# Altium PCB Converter.PcbDoc
Units mil, origin at the board's own origin, x right, y up, seen from the top; angles counter-clockwise.
Board outline 880 x 1440 mil, 2 copper layers (Top1, Bottom2), stack 36.422 mil thick; 13 components, 18 nets, 131 pads, 25 vias.
Unrouted connection lines stored in the file: 98.
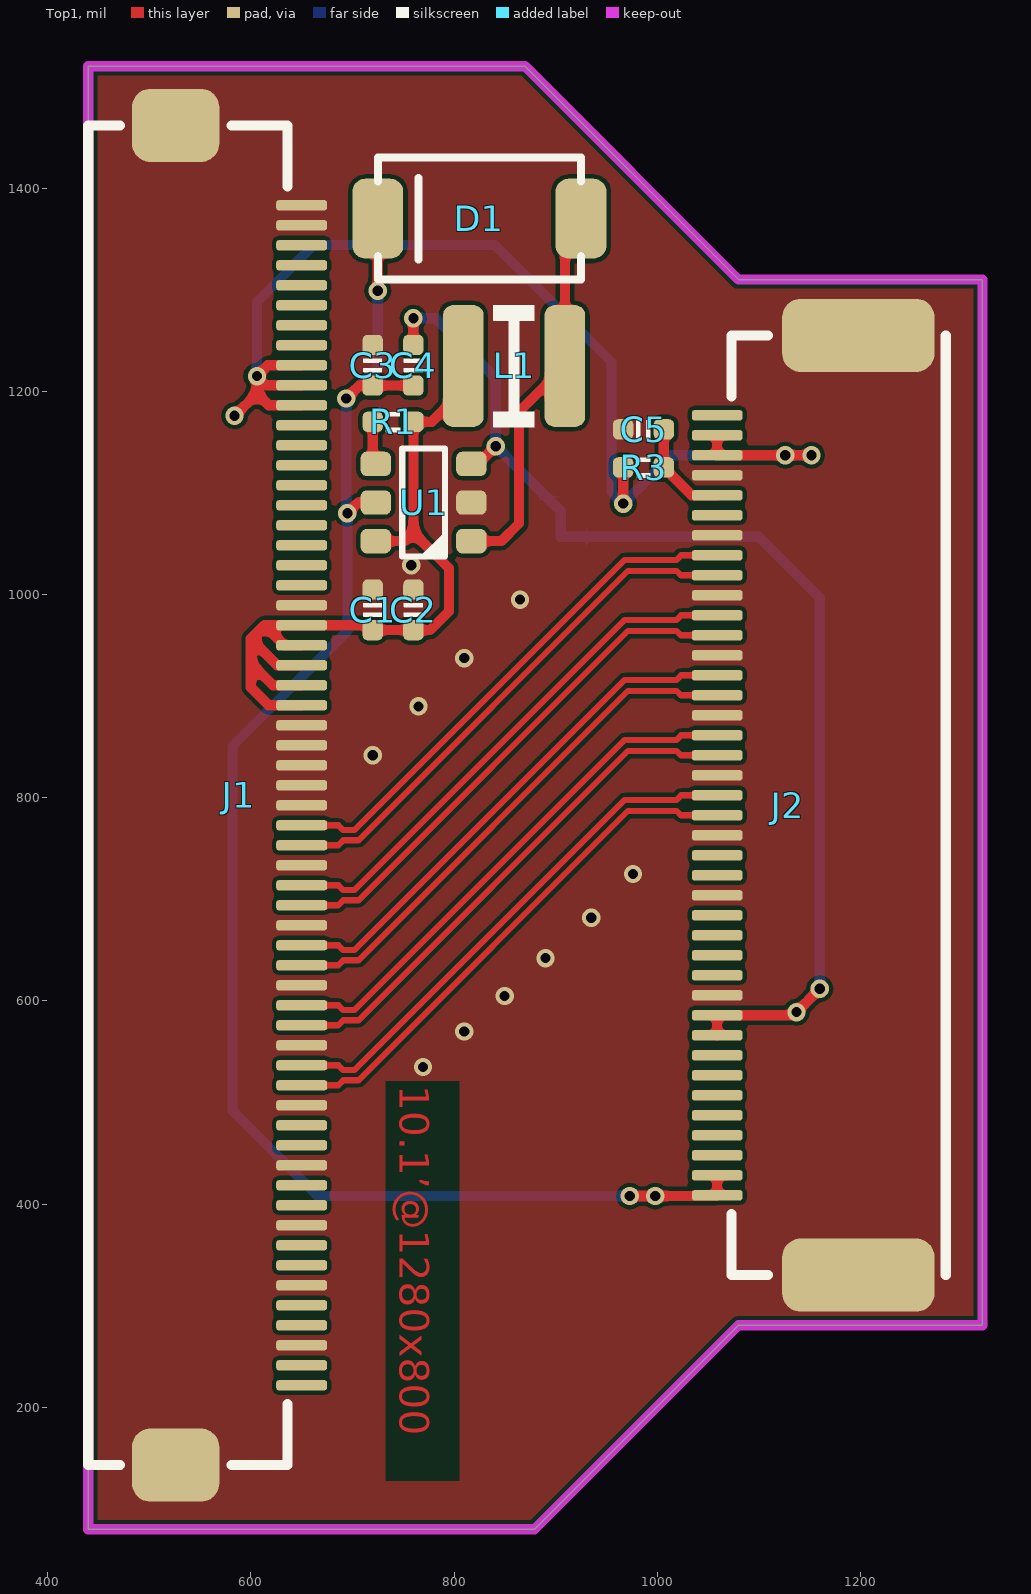
[diagram p0: Top1 view]
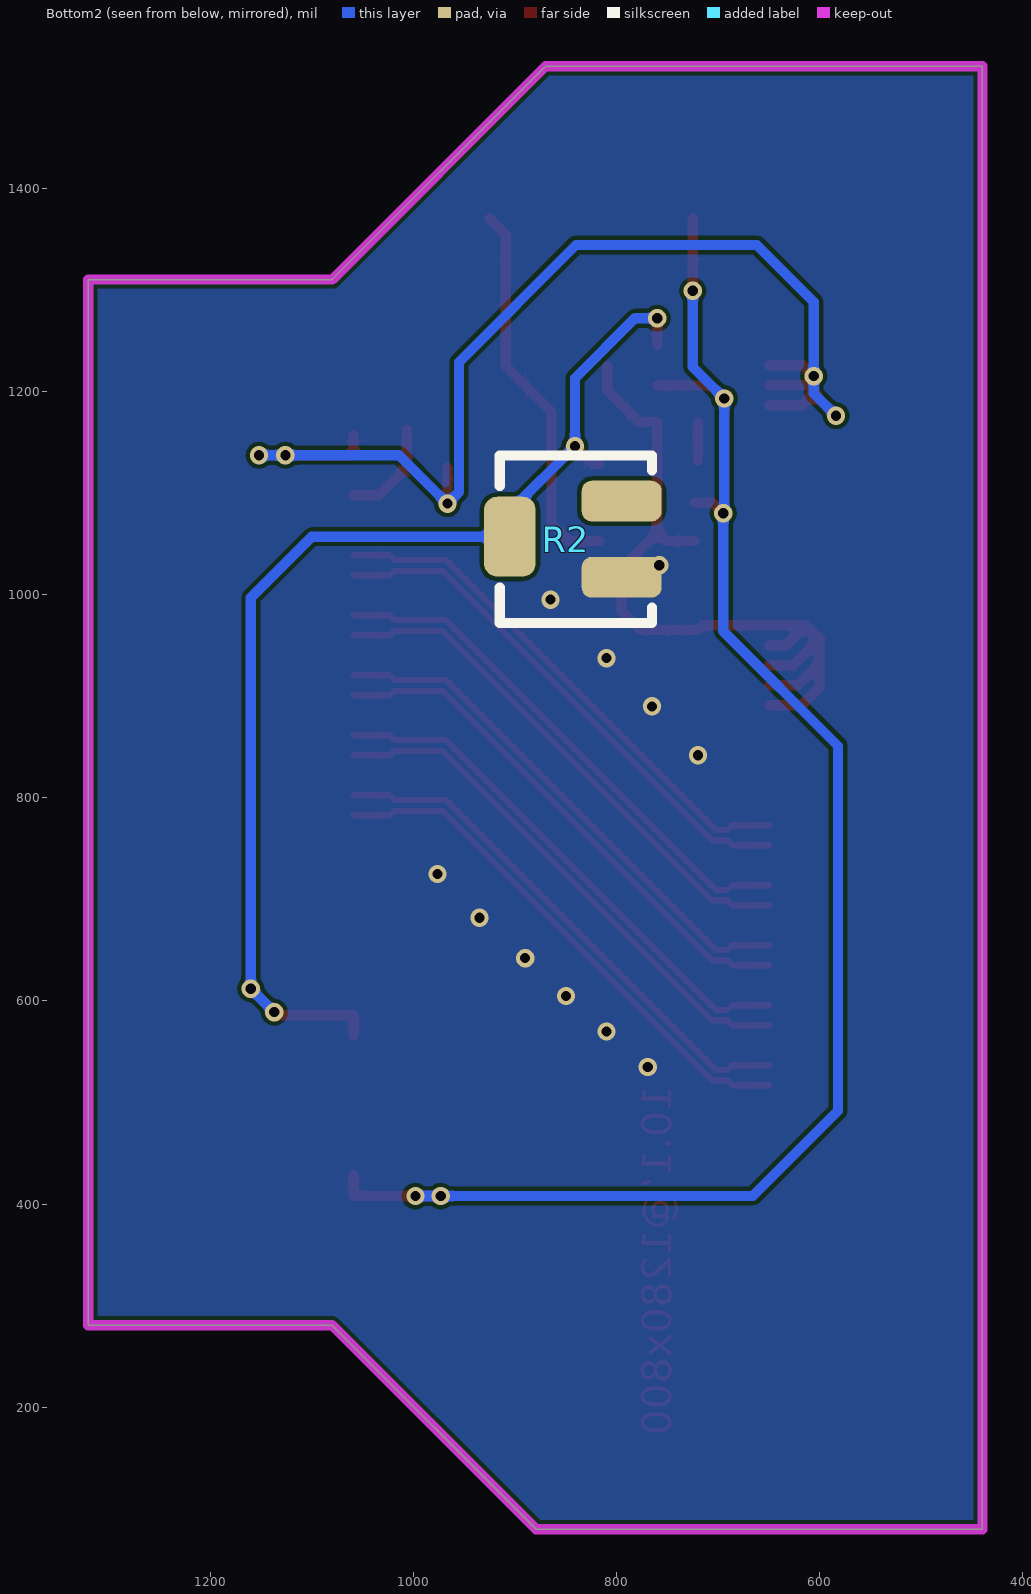
[diagram p1: Bottom2 view, seen from below]
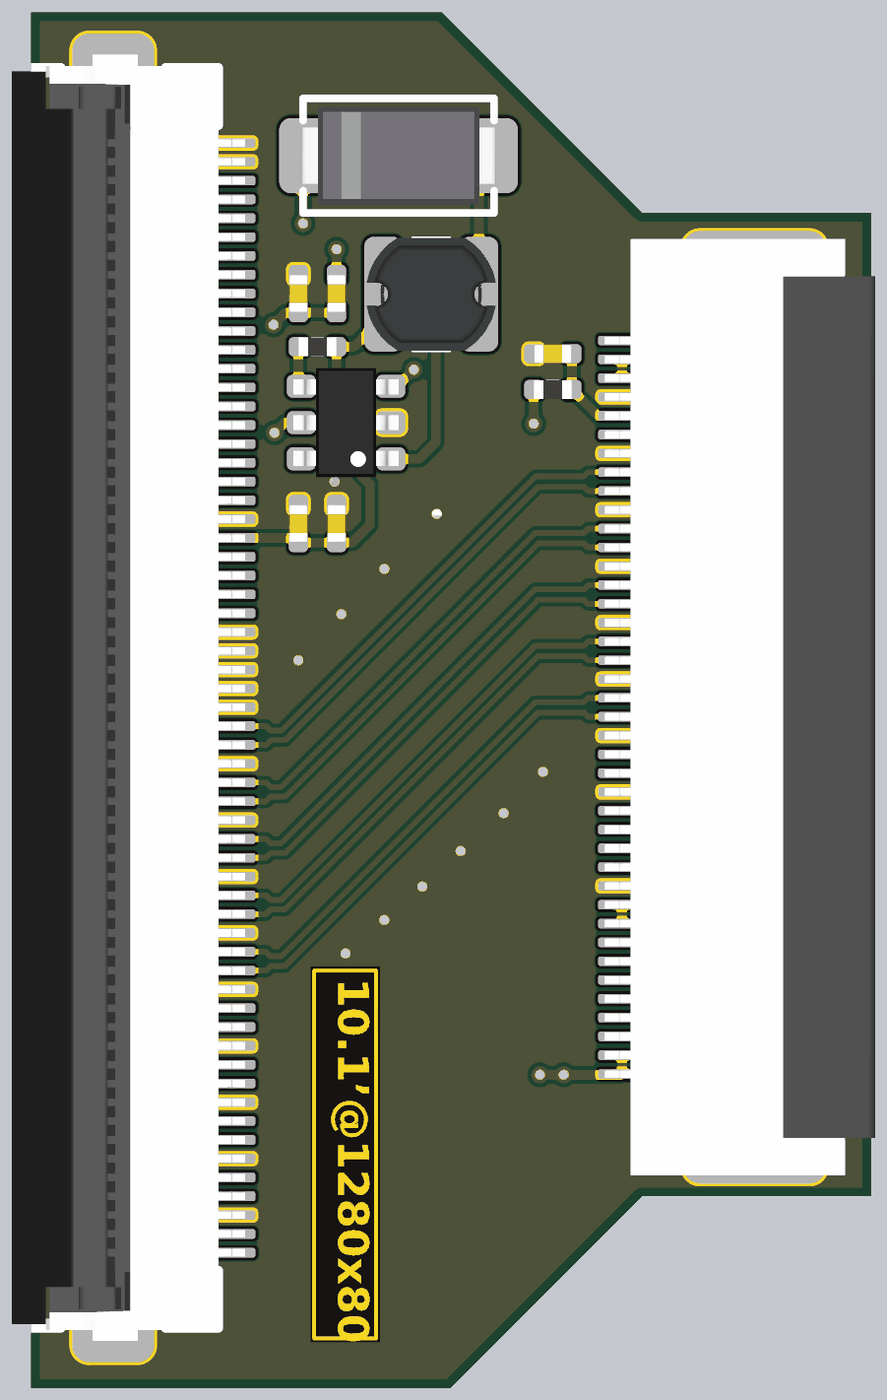
[diagram p2: 3D render of the assembled board from above, using the file's embedded part models]

## Layer stack, top to bottom
Top Solder: solder mask 0.4, Solder Resist, Dk 3.5
Top1: signal copper 1.4
Dielectric1: core 33.622, FR-4, Dk 4.2
Bottom2: signal copper 1.4
Bottom Solder: solder mask 0.4, Solder Resist, Dk 3.5

## Board outline
440,80 440,1520 870,1520 1080,1310 1320,1310 1320,280.83 1080,280.83 879.17,80

## Design rules (kind name [scope] priority, off if disabled: settings)
Clearance [All] p1: gap=4 ignorepadtopadclearanceinfootprint=FALSE except(0: Arc-Hole Track-Hole SMDPad-Hole THPad-Hole Via-Hole Fill-Hole Poly-Hole Region-Hole Text-Hole)
ComponentClearance [All] p1: gap=0 collisioncheckmode=3 verticalgap=0 showdistances=FALSE
DiffPairsRouting [All] p1: maxlimit=9 minlimit=4 mostfreqgap=4 toplayer_minwidth=4 toplayer_maxwidth=15 toplayer_prefwidth=4 bottomlayer_minwidth=4 bottomlayer_maxwidth=15 bottomlayer_prefwidth=4 maxuncoupledlength=500
FanoutControl Fanout_BGA [All] p1: bgadir=Out bgaviamode=Centered fanoutstyle=Auto fanoutdirection=Alternating viagrid=1 // Fanout_BGA (Default Rule)
HoleSize [All] p1: absolutevalues=TRUE maxlimit=10000 minlimit=8 maxpercent=80.000 minpercent=20.000
MinimumSolderMaskSliver [All] p1 off: minsoldermaskwidth=2
PlaneClearance [All] p1: clearance=8
PlaneConnect [All] p1: planeconnectstyle=Direct reliefexpansion=20 reliefentries=4 reliefconductorwidth=10 reliefairgap=10
PolygonConnect [All] p1: connectstyle=Direct reliefconductorwidth=10 reliefentries=4 polygonreliefangle="90 Angle" airgapwidth=10
RoutingVias [All] p1: holewidth=8 width=16 viastyle="Through Hole" minholewidth=6 minwidth=12 maxholewidth=28 maxwidth=50
SilkToSilkClearance [All] p1: silktosilkclearance=0
SilkToSolderMaskClearance [IsPad] p1: minsilkscreentomaskgap=0 clearancetoexposedcopper=TRUE
SolderMaskExpansion [All] p1: expansion=3
Width GND [(InNet('AGND') OR InNet('GND'))] p1: maxlimit=50 minlimit=4 preferedwidth=10
Width VCC [(InNet('VDD_SYS_3.3V') OR InNet('VDD_AV_3.3V') OR InNet('VDD_5V') OR InNet('VDD1V2-SYS') OR InNet('VDD1V1-EPHY') OR InNet('VDD-CPUX') OR InNet('NetC15_2') OR InNet('NetC9_2') OR InNet('NetC12_2'))] p2: maxlimit=50 minlimit=4 preferedwidth=10
Width [All] p3: maxlimit=10000 minlimit=4 preferedwidth=4
21 further rules are at their usual default settings.

## Classes and differential pairs
net class MIPI: MIPI1_D0N MIPI1_D0P MIPI1_D1N MIPI1_D1P MIPI1_D2N MIPI1_D2P MIPI1_D3N MIPI1_D3P MIPI1_DCN MIPI1_DCP

## Components (designator, comment, footprint, x,y, rotation, side; value= is the part's Value field where it differs from the comment)
C1 "10uF" CAP_0402 720,985 r270 top value=0.1u
C2 "0.1uF" CAP_0402 760,985 r270 top value=0.1u
C3 "10uF" CAP_0402 720,1225.71 r270 top value=0.1u
C4 "0.1uF" CAP_0402 760,1225.71 r270 top value=0.1u
C5 "2.2uF" CAP_0402 986.5,1162.59 r180 top value=0.1u
D1 "RSX501L-20" DO-214 825,1370 r0 top
J1 "0.5S_A_60PWB" FFC_0.5_60 590,802.48 r270 top
J2 "0.5S_A_40PWB" FFC_0.5_40 1119,792.64 r90 top
L1 "CD32" IND_CD32 859.13,1225 r0 top value=22uH
R1 "33K" RES_0402 740,1170 r0 top value=22R
R2 "电位器-贴片" "贴片电位器 3*3" 865,1062 r0 bottom
R3 "33K" RES_0402 986.5,1125.19 r180 top value=22R
U1 "RT9293" SOT23-6 770,1090.6 r180 top

## Footprints (in the part's own frame and the unit in brackets; to place one, negate y for a bottom-side part, rotate by r counter-clockwise, add the part's x,y. Pads: shape width x height; smd on the part's side, far side on the other; paste and mask are expansions set on the pad)
CAP_0402 [mil]
  rrect50% 20x20 smd: 1(-20,0) 2(20,0)
  silkscreen extent -7,-9 7,9, body extent -20,-10 20,10, height 20
DO-214 [mm]
  rrect50% 1.27x2 smd: 1(-2.54,0) 2(2.54,0)
  silkscreen extent -2.54,-1.52 2.54,1.52, body extent -2.6,-1.3 2.6,1.3, height 2.42
FFC_0.5_40 [mil]
  rrect50% 72x150 smd: 0(-462.48,-78.98) 0(462.48,-78.98)
  rrect50% 10x50 smd: 1(-383.86,60) 2(-364.17,60) 3(-344.49,60) 4(-324.8,60) 5(-305.12,60) 6(-285.43,60) 7(-265.75,60) 8(-246.06,60) 9(-226.38,60) 10(-206.69,60) 11(-187.01,60) 12(-167.32,60) 13(-147.64,60) 14(-127.95,60) 15(-108.27,60) 16(-88.58,60) 17(-68.9,60) 18(-49.21,60) 19(-29.53,60) 20(-9.84,60) 21(9.84,60) 22(29.53,60) 23(49.21,60) 24(68.9,60) 25(88.58,60) 26(108.27,60) 27(127.95,60) 28(147.64,60) 29(167.32,60) 30(187.01,60) 31(206.69,60) 32(226.38,60) 33(246.06,60) 34(265.75,60) 35(285.43,60) 36(305.12,60) 37(324.8,60) 38(344.49,60) 39(364.17,60) 40(383.86,60)
  silkscreen extent -462,-165 462,46, body extent -490,-205 490,78, height 99
FFC_0.5_60 [mil]
  rrect50% 72x86 smd: 0(-659.33,-63.98) 0(659.33,-63.98)
  rrect50% 10x50 smd: 1(-580.71,60) 2(-561.02,60) 3(-541.34,60) 4(-521.65,60) 5(-501.97,60) 6(-482.28,60) 7(-462.6,60) 8(-442.91,60) 9(-423.23,60) 10(-403.54,60) 11(-383.86,60) 12(-364.17,60) 13(-344.49,60) 14(-324.8,60) 15(-305.12,60) 16(-285.43,60) 17(-265.75,60) 18(-246.06,60) 19(-226.38,60) 20(-206.69,60) 21(-187.01,60) 22(-167.32,60) 23(-147.64,60) 24(-127.95,60) 25(-108.27,60) 26(-88.58,60) 27(-68.9,60) 28(-49.21,60) 29(-29.53,60) 30(-9.84,60) 31(9.84,60) 32(29.53,60) 33(49.21,60) 34(68.9,60) 35(88.58,60) 36(108.27,60) 37(127.95,60) 38(147.64,60) 39(167.32,60) 40(187.01,60) 41(206.69,60) 42(226.38,60) 43(246.06,60) 44(265.75,60) 45(285.43,60) 46(305.12,60) 47(324.8,60) 48(344.49,60) 49(364.17,60) 50(383.86,60) 51(403.54,60) 52(423.23,60) 53(442.91,60) 54(462.6,60) 55(482.28,60) 56(501.97,60) 57(521.65,60) 58(541.34,60) 59(561.02,60) 60(580.71,60)
  silkscreen extent -659,-150 659,46, body extent -673,-170 673,74, height 79
IND_CD32 [mil]
  rrect50% 40x120 smd: 1(-50,0) 2(50,0)
  silkscreen extent -20,-60 20,60, body extent -68,-59 68,59, height 83
RES_0402 [mil]
  rrect50% 20x20 smd: 1(-20,0) 2(20,0)
  silkscreen extent -6,-10 6,10, body extent -20,-10 20,10, height 14
SOT23-6 [mil]
  rrect50% 30x24 smd: 1(-47,38) 2(-47,0) 3(-47,-38) 4(47,-38) 5(47,0) 6(47,38)
  silkscreen extent -21,-53 21,53, body extent -55,-57 55,57, height 57
"贴片电位器 3*3" [mil]
  rrect50% 78.74x40.18 smd: 1(-70,45) 2(-70,-30)
  rrect50% 50.74x78.74 smd: 3(40,5)
  silkscreen extent -100,-75 50,90, body extent -100,-53 50,69, height 64

## Part data
C1 C2 C3 C4 C5: library part 电容-0402, "Capacitor"
D1: "Diode Schottky 40V 1A Surface Mount SMA _DO-214AC_", Package="DO-214AC-214 ON Semiconductor", Availability=Unavailable, MF="ON Semiconductor", MP=SS14, Price=None, SnapEDA_Link=https://www.snapeda.com/parts/SS14/ON%20Semiconductor/view-part/1413348/?ref=snap
J1: library part FPC60-0.5mm, "Header, 60-Pin", LatestRevisionDate=17-Jul-2002, LatestRevisionNote="Re-released for DXP Platform.", Publisher="Altium Limited"
J2: library part FPC40-0.5mm, "Header, 40-Pin", LatestRevisionDate=17-Jul-2002, LatestRevisionNote="Re-released for DXP Platform.", Publisher="Altium Limited"
L1: library part Ind_CD32, "Inductor", Specification="±5% 100mA", Type=CD32
R1 R3: library part 电阻-0402, "Resistor"
U1: "LCD-LED Driver"
R2: ComponentLink1Description="Manufacturer Link", ComponentLink1URL=http://bourns.com/2/search.html, DatasheetVersion=Oct-2003, PackageDescription="Square Trimming Potentiometer", PackageReference=POT4MM-2, Published=17-Dec-2003, Publisher="Altium Limited"

## Via types
v1: diameter 18, hole 10, Top1 to Bottom2, tented both sides, 25 vias

## Nets (pads, with @x,y where several pads share a name; then routed paths per layer and width w, separated by ;. In a path a pad name is that pad's centre, name@x,y a point inside that pad or via, vN(x,y) a via of type N, cw(c..) or ccw(c..) an arc to the next point about the centre after c; other vN are vias at no path point)
GND: C1.1 C2.1 C3.1 C5.2 J1.0 J1.1 J1.2 J1.21 J1.27 J1.28 J1.29 J1.30 J1.31 J1.34 J1.37 J1.40 J1.43 J1.46 J1.49 J1.52 J1.55 J1.58 J2.0 J2.11 J2.16 J2.19 J2.22 J2.25 J2.28 J2.31 J2.34 J2.37 R2.1 U1.2
  other v1: 769.39,535 810,570 849.82,605 890,642.18 935,681.87 976.2,725 719.93,841.85 765.07,890 810,937.45 865,995 757.95,1028.86
MIPI1_D0N: J1.32 J2.33 | length 523
  Top1 w6: J1.32 686.27,772.95 691,768.22 702,768.22 968,1034.22 1019,1034.22 1023.48,1038.7 J2.33
MIPI1_D0P: J1.33 J2.32 | length 522.6
  Top1 w6: J1.33 686.05,753.27 691,758.22 706.14,758.22 971.14,1023.22 1019,1023.22 1023.2,1019.02 J2.32
MIPI1_D1N: J1.35 J2.30 | length 523
  Top1 w6: J1.35 686.27,713.9 691,709.16 702,709.16 968,975.16 1019,975.16 1023.48,979.65 J2.30
MIPI1_D1P: J1.36 J2.29 | length 522.6
  Top1 w6: J1.36 686.05,694.21 691,699.16 706.14,699.16 971.14,964.16 1019,964.16 1023.2,959.96 J2.29
MIPI1_D2N: J1.41 J2.24 | length 523
  Top1 w6: J1.41 686.27,595.79 691,591.06 702,591.06 968,857.06 1019,857.06 1023.48,861.54 J2.24
MIPI1_D2P: J1.42 J2.23 | length 522.6
  Top1 w6: J1.42 686.05,576.1 691,581.06 706.14,581.06 971.14,846.06 1019,846.06 1023.2,841.85 J2.23
MIPI1_D3N: J1.44 J2.21 | length 523
  Top1 w6: J1.44 686.27,536.73 691,532 702,532 968,798 1019,798 1023.48,802.48 J2.21
MIPI1_D3P: J1.45 J2.20 | length 522.6
  Top1 w6: J1.45 686.05,517.05 691,522 706.14,522 971.14,787 1019,787 1023.2,782.8 J2.20
MIPI1_DCN: J1.38 J2.27 | length 523
  Top1 w6: J1.38 686.27,654.84 691,650.11 702,650.11 968,916.11 1019,916.11 1023.48,920.59 J2.27
MIPI1_DCP: J1.39 J2.26 | length 522.6
  Top1 w6: J1.39 686.05,635.16 691,640.11 706.14,640.11 971.14,905.11 1019,905.11 1023.2,900.91 J2.26
NetC5_1: C5.1 J2.36 R3.1 | length 101.3
  Top1 w10: C5.1 R3.1 1033.94,1097.76 J2.36
NetD1_2: D1.2 L1.2 U1.1 | length 379.5
  Top1 w10: U1.1 846.6,1052.6 864,1070 864,1179.87 L1.2 909.13,1354.13 D1.2
NetR1_1: R1.1 U1.4 | length 38.4
  Top1 w10: U1.4@720,1131.6 R1.1
VCC_3V3: J1.9 J1.10 J1.11 J2.38 J2.39 R3.2 | length 1231.7
  Top1 w10: v1(584,1176) 606,1198 ; J1.11 617.66,1186.34 606,1198 ; J1.10 614.98,1206.02 v1(606,1215) ; J1.9 616.71,1225.71 v1(606,1215) ; v1(966.5,1089.5) R3.2 ; J2.39 J2.38 v1(1126,1137.13) v1(1151.87,1137.13) ; 606,1198 v1(606,1215)
  Bottom2 w10: v1(584,1176) 606,1198 v1(606,1215) 606,1288 662,1344 840,1344 955,1229 955,1101 v1(966.5,1089.5) 1014.13,1137.13 v1(1126,1137.13) v1(1151.87,1137.13)
VLED+: C3.2 C4.2 D1.1 J2.1 J2.2 U1.5 | length 1598.5
  Top1 w10: v1(694,1193) 706.71,1205.71 C3.2 C4.2 ; v1(695,1080) 705.6,1090.6 U1.5 ; v1(725,1299) D1.1 ; v1(973,408) v1(998,408) 1058.22,408 J2.1 J2.2
  Bottom2 w10: v1(725,1299) 725,1224 v1(694,1193) 694,1081 v1(695,1080) 695,964 582,851 582,492 666,408 v1(973,408) v1(998,408)
VLED-: C4.1 J2.9 J2.10 R2.3 U1.3 | length 1174.3
  Top1 w10: C4.1 v1(760,1272) ; U1.3 823.6,1128.6 v1(841,1146) ; J2.9 J2.10 1133.95,585.95 v1(1137,589) v1(1160,612)
  Bottom2 w10: v1(760,1272) 782,1272 841,1213 v1(841,1146) 905,1082 R2.3 1100,1057 1160,997 v1(1160,612) v1(1137,589)
VUSB: C1.2 C2.2 J1.22 J1.23 J1.24 J1.25 J1.26 L1.1 R1.2 U1.6 | length 807.2
  Top1 w10: J1.26 617.68,891.06 600,908.75 600,932.62 ; J1.25 621.87,910.75 600,932.62 ; J1.24 626.06,930.43 600,956.49 ; J1.23 633,950.12 613.31,969.8 ; U1.6 751.6,1052.6 760,1061 ; L1.1 809.13,1201.13 778,1170 R1.2 760,1061 ; 600,932.62 600,956.49 ; 600,956.49 613.31,969.8 ; 613.31,969.8 J1.22 715.2,969.8 C1.2 C2.2 776.35,965 795,983.65 795,1026 760,1061
pads on no net: J1.3 J1.4 J1.5 J1.6 J1.7 J1.8 J1.12 J1.13 J1.14 J1.15 J1.16 J1.17 J1.18 J1.19 J1.20 J1.47 J1.48 J1.50 J1.51 J1.53 J1.54 J1.56 J1.57 J1.59 J1.60 J2.3 J2.4 J2.5 J2.6 J2.7 J2.8 J2.12 J2.13 J2.14 J2.15 J2.17 J2.18 J2.35 J2.40 R2.2

## Polygon pours and split planes (outlines as drawn)
GND on Top1 (solid, remove dead copper, pour order 2): 350,1600 1400,1600 1400,0 350,0
GND on Bottom2 (solid, remove dead copper, pour order 4): 350,1600 1400,1600 1400,0 350,0

## Keep-outs
Keep-Out Layer:
  the board outline again, w10

## Other copper
Top1:
  text "10.1’@1280x800" at 736.56,517.15 h50 r270

## Silkscreen, mask and mechanical layers (free items; w line width, h text height)
Top Solder:
  region: 805.35,521.15 732.56,521.15 732.56,128.02 805.35,128.02